# EAGLE board ProiectTSC_v6 (EAGLE 9.7.0)
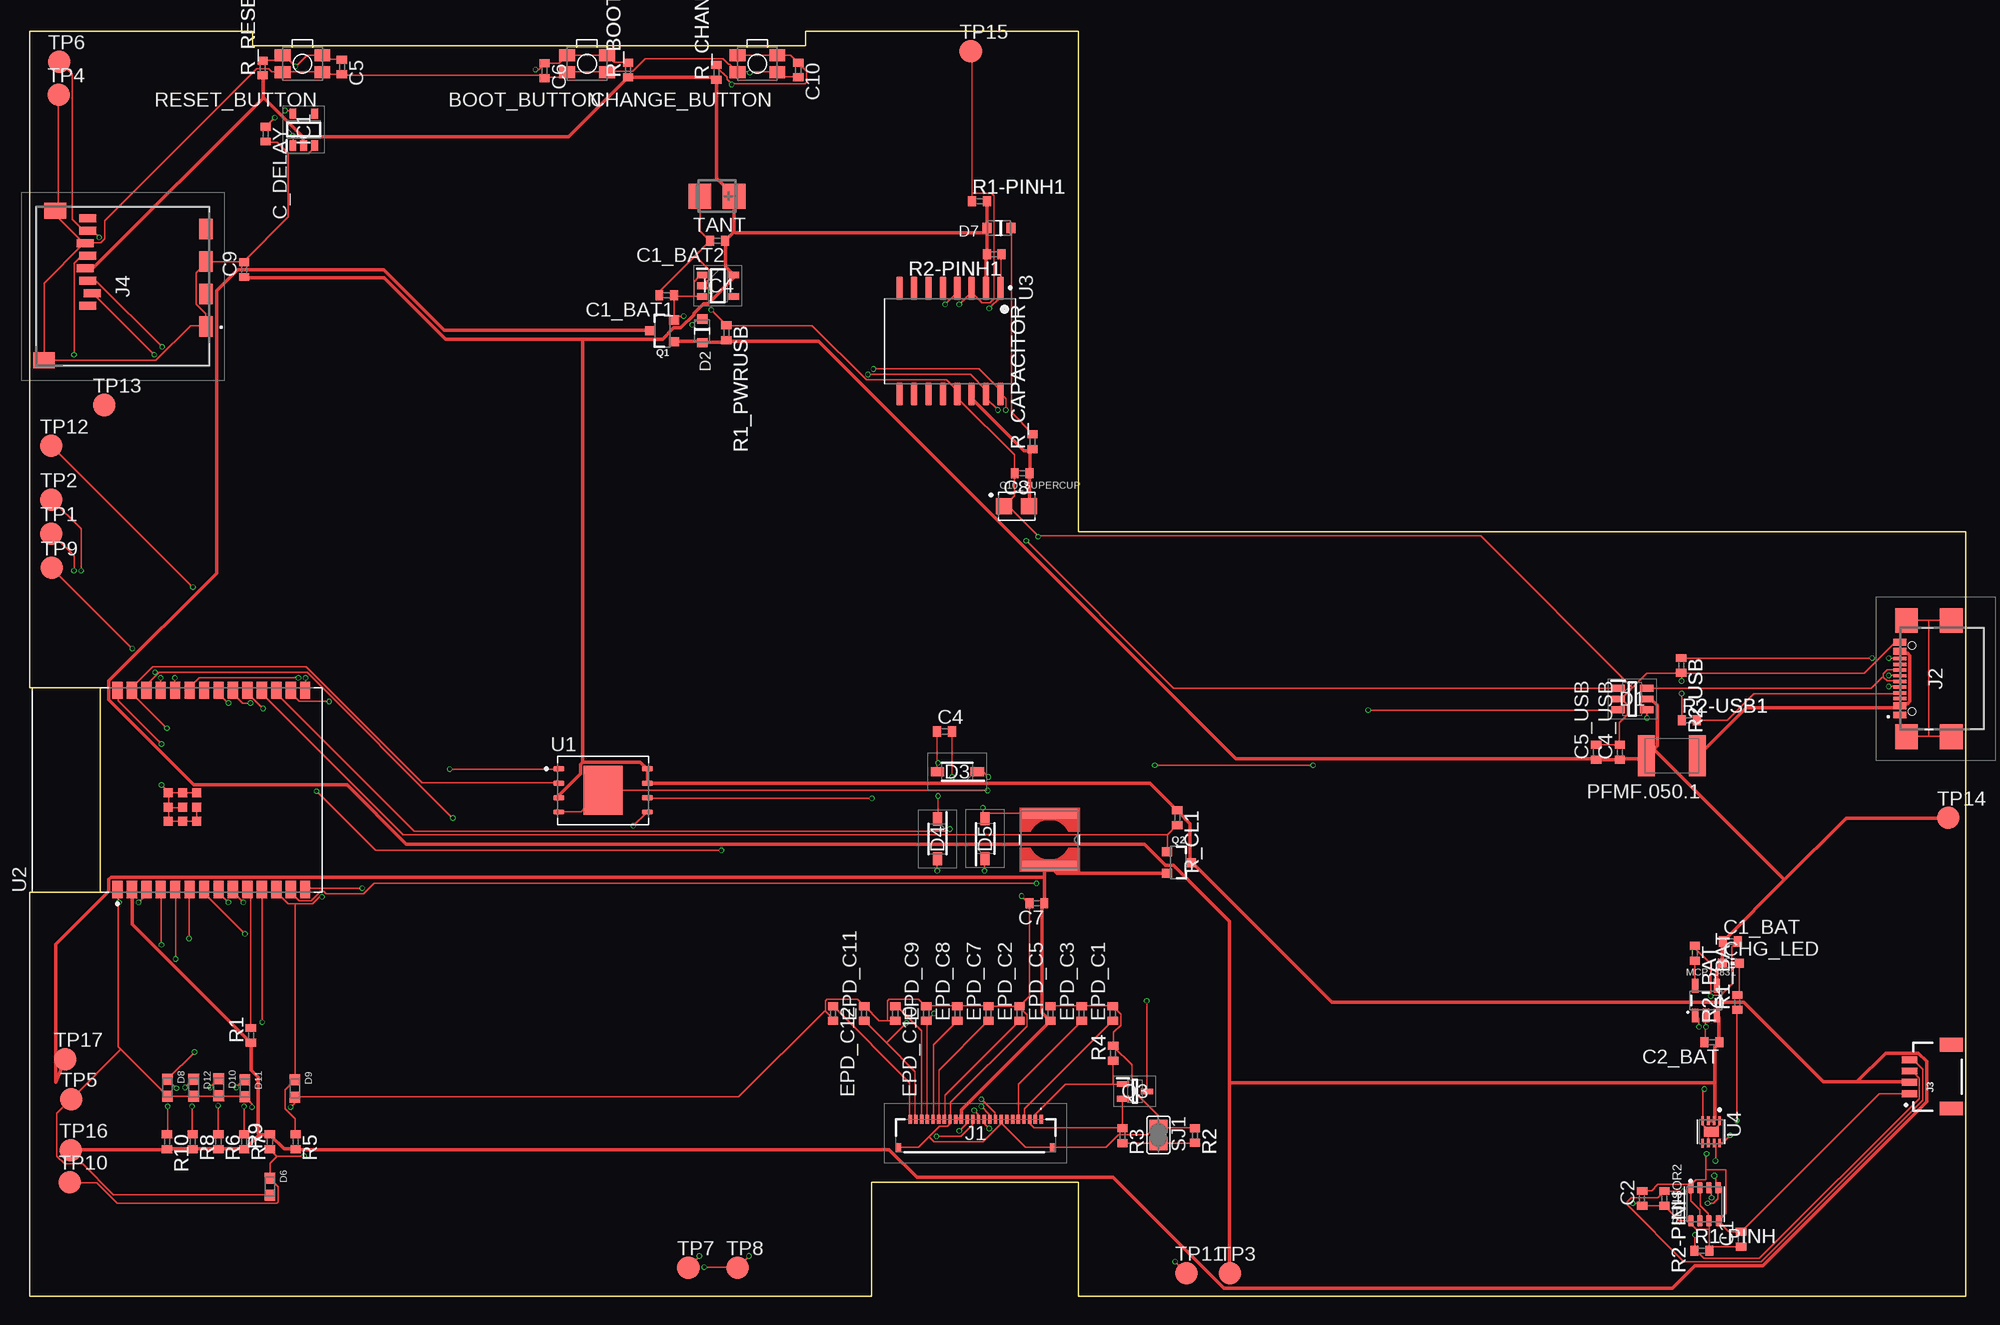
[diagram p0: board, top side]
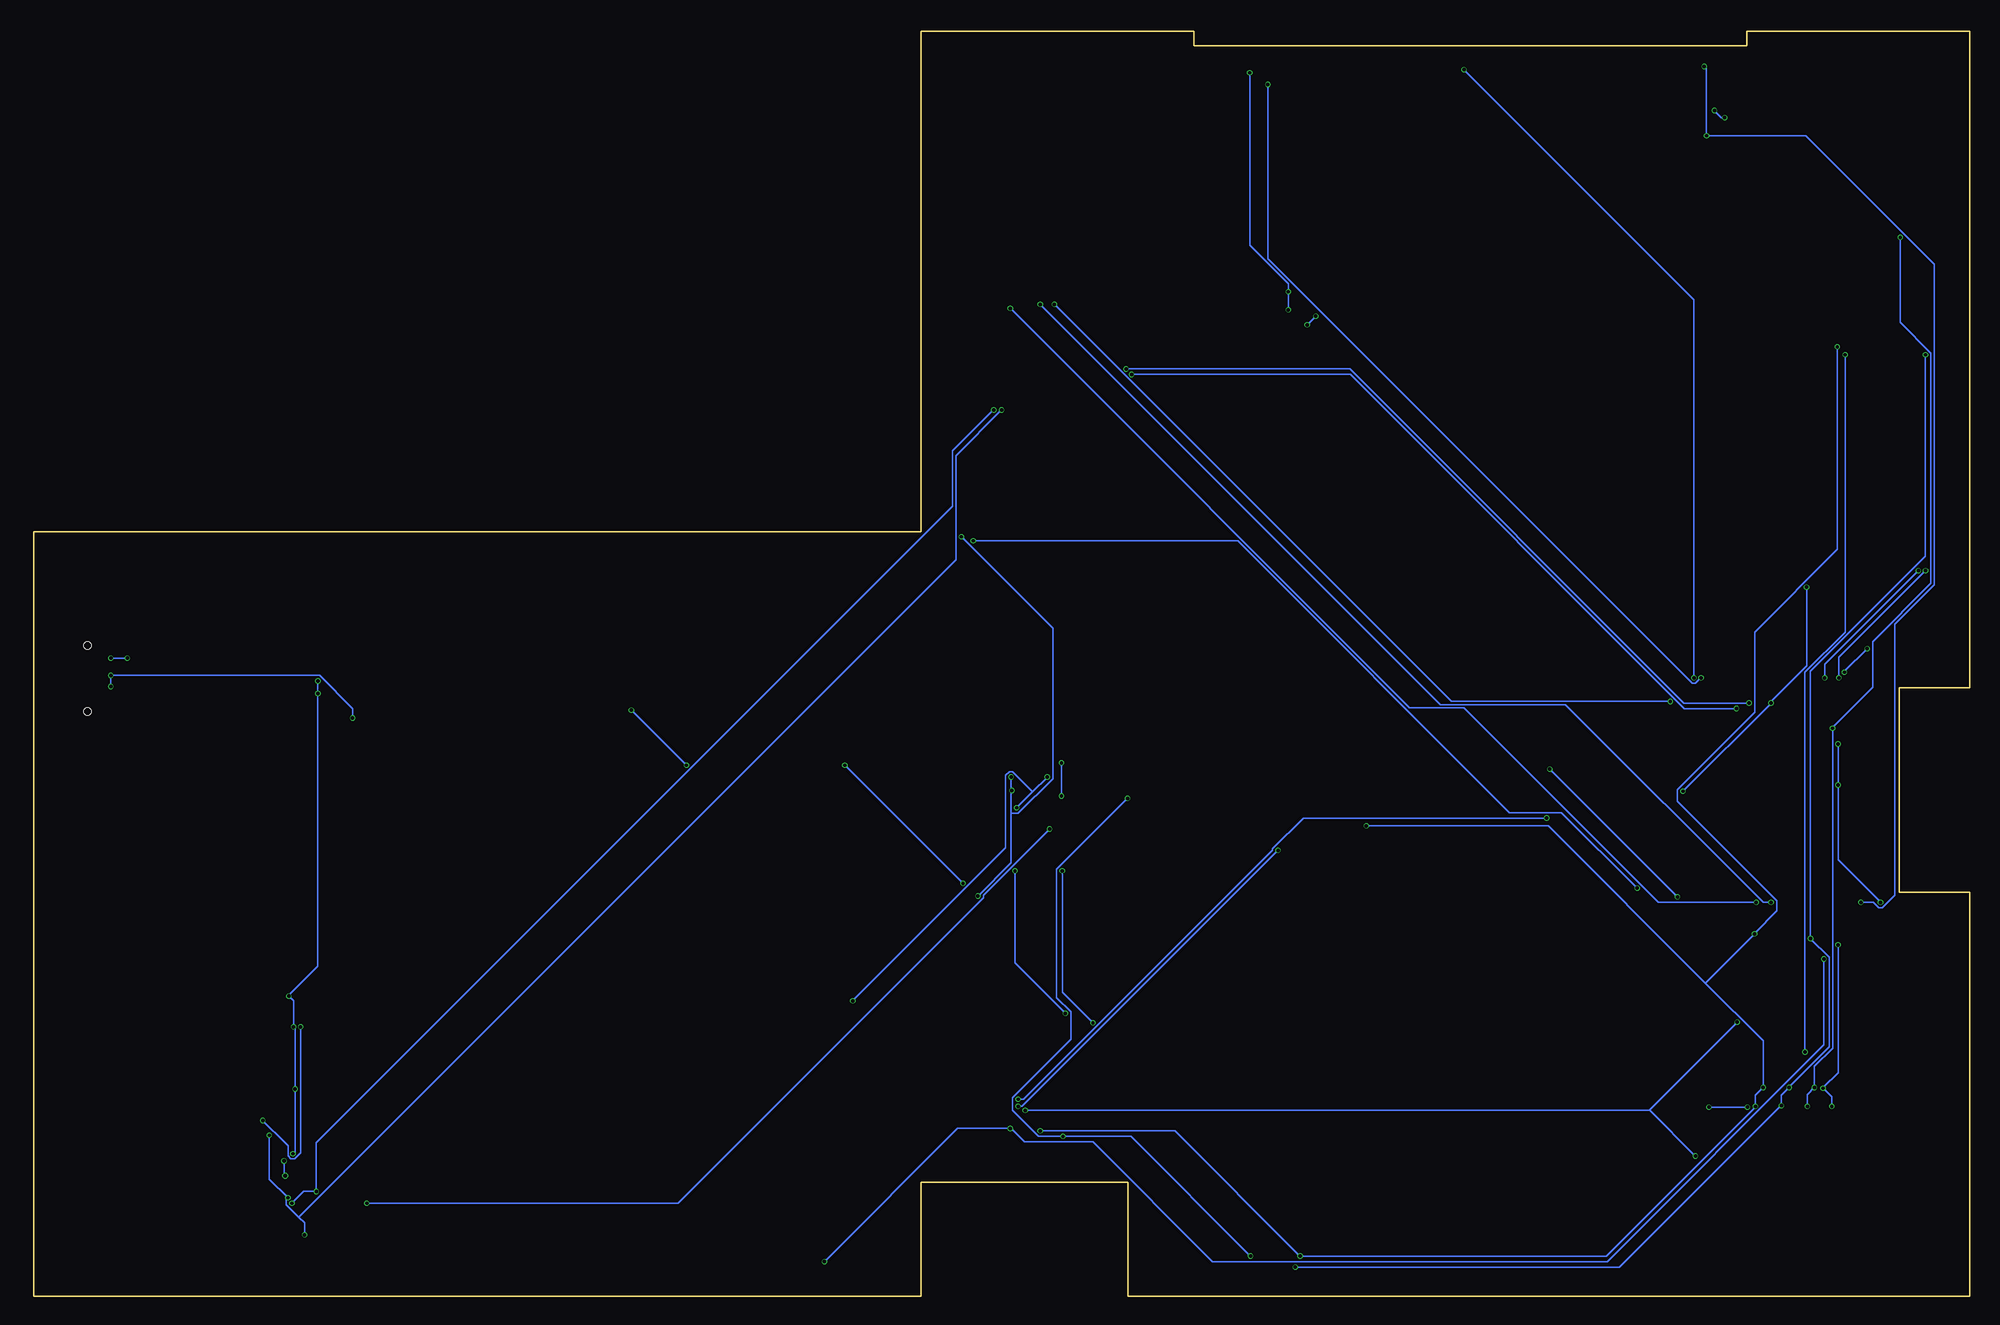
[diagram p1: board, bottom side, seen from below]

Size 170.2 x 111.2 mm. Coordinates in mm from the lower left corner, seen from the top.
Outline: 0,0 74,0 74,10 92.2,10 92.2,0 170.2,0 170.2,67.2 92.2,67.2 92.2,111.2 68.2,111.2 68.2,109.9 19.6,109.9 19.6,111.2 0,111.2 0,53.5 6.2,53.5 6.2,35.5 0,35.5 0,0
Copper layers (1*16): Top 0.035mm / dielectric 1.6mm / Bottom 0.035mm
Design rules "jlcpcb-2layers.dru": minimum track width 0.15mm, minimum drill 0.3mm, track to track 5mil, track to pad 5mil, pad to pad 5mil, via to via 5mil, smd to smd 5mil, copper to edge 0.2mm, drill to drill 6mil, minimum pad ring 10mil, minimum via ring 3mil, stop-mask expansion 4mil, vias tented up to drill 0mil, thermal gap 10mil
Net classes: 1 power: width 0.3 mm

## Footprints (pad centres in the part's own frame; a part is rotated, then mirrored left to right if it is on the bottom)
MYBUTTON = smd 1.4 x 1.05: 1 1.75,0.75; 2 -1.75,0.75; 3 -1.75,-0.75; 4 1.75,-0.75
EAGLE-LTSPICE_C0402 = smd 0.7 x 0.9: 1 -0.65,0; 2 0.65,0
CAPCP3225X100N = smd 1.4 x 1.4: 1 -1.1,0; 2 1.1,0
ADAFRUIT_CHIP-LED0603 = smd 0.8 x 0.8: A 0,-0.75; C 0,0.75
SOT95P280X145-6N = smd 1.2 x 0.6: 1 -1.25,0.95; 2 -1.25,0; 3 -1.25,-0.95; 4 1.25,-0.95; 5 1.25,0; 6 1.25,0.95
ESP32_WROVER_AVX---SD0805S020S1R0_AVX_SD0805S020S1R0_0 = smd 0.8 x 0.9: 1 -1.05,0; 2 1.05,0
SOD3716X135N = smd 1.15 x 0.8: 1 -1.75,0; 2 1.75,0
DIOC1608X36N = smd 0.97 x 0.94: 1 -0.75,0; 2 0.75,0
SOT95P280X125-5N = smd 0.9 x 0.6: 1 -1.4,0.95; 2 -1.4,0; 3 -1.4,-0.95; 4 1.4,-0.95; 5 1.4,0.95
SOT95P280X120-5N = smd 0.9 x 0.6: 1 -1.4,0.95; 2 -1.4,0; 3 -1.4,-0.95; 4 1.4,-0.95; 5 1.4,0.95
FH34SRJ24S05SH99 = smd 0.3 x 0.8: 1 5.75,1.45; 2 5.25,1.45; 3 4.75,1.45; 4 4.25,1.45; 5 3.75,1.45; 6 3.25,1.45; 7 2.75,1.45; 8 2.25,1.45; 9 1.75,1.45; 10 1.25,1.45; 11 0.75,1.45; 12 0.25,1.45; 13 -0.25,1.45; 14 -0.75,1.45; 15 -1.25,1.45; 16 -1.75,1.45; 17 -2.25,1.45; 18 -2.75,1.45; 19 -3.25,1.45; 20 -3.75,1.45; 21 -4.25,1.45; 22 -4.75,1.45; 23 -5.25,1.45; 24 -5.75,1.45 | smd 0.4 x 0.8: MP1 6.75,-1.05; MP2 -6.75,-1.05
SAMACSYS_PARTS_USB4110GFA = smd 0.3 x 1.15: A1 -3.35,3.678; A4 -2.55,3.678; A5 -1.25,3.678; A6 -0.25,3.678; A7 0.25,3.678; A8 1.25,3.678; A9 2.55,3.678; A12 3.35,3.678; B1 3.05,3.678; B4 2.25,3.678; B5 1.75,3.678; B6 0.75,3.678; B7 -0.75,3.678; B8 -1.75,3.678; B9 -2.25,3.678; B12 -3.05,3.678 | smd 2.18 x 2: MP1 -5.11,-0.827; MP2 5.11,-0.827; MP3 -5.11,3.103; MP4 5.11,3.103 | hole 0.65: -2.89,2.603; 2.89,2.603
JST04_1MM_RA = smd 0.6 x 1.35: 1 -1.5,0; 2 -0.5,0; 3 0.5,0; 4 1.5,0 | smd 1.2 x 2: NC1 2.8,-3.675; NC2 -2.8,-3.675
112ATAARR03ATTEND = smd 1.8 x 1.2: G1 10.6,10.4; G2 4.9,10.4; S1 7.75,10.4; S2 2.05,10.4 | smd 1.4 x 1.9: G3 13.6,-3.85; G4 0.45,-2.85 | smd 0.7 x 1.5: P1 8.8,0; P2 7.7,0.4; P3 6.6,0; P4 5.5,-0.2; P5 4.4,0; P6 3.3,-0.2; P7 2.2,0; P8 1.1,0
IND_4828-WE-TPC_WRE = smd 0.889 x 4.826: 1 -2.286,0; 2 2.286,0
ESP32_WROVER_SPARKFUN-IC-POWER_SOT23-5 = smd 0.55 x 1.2: 1 -0.95,-1.3; 2 0,-1.3; 3 0.95,-1.3; 4 0.95,1.3; 5 -0.95,1.3
ESP32C6_VARISTOR_CT/CN1812 = smd 1.5 x 3.6: 1 -2.25,0; 2 2.25,0
ESP32_WROVER_SPARKFUN-DISCRETESEMI_SOT23-3 = smd 0.8 x 0.9: 1 -0.95,-1; 2 0.95,-1; 3 0,1.1
SOT65P210X110-3N = smd 1.05 x 0.5: 1 -1.05,0.65; 2 -1.05,-0.65; 3 1.05,0
ESP32_WROVER_EAGLE-LTSPICE_R0402 = smd 0.7 x 0.9: 1 -0.65,0; 2 0.65,0
ESP32_WROVER_BME680_PSON80P300X300X100-8N = smd 1.016 x 0.5: 1 1.458,1.2; 2 1.458,0.4; 3 1.458,-0.4; 4 1.458,-1.2; 5 -1.458,-1.22; 6 -1.458,-0.4; 7 -1.458,0.4; 8 -1.458,1.2
SJ = smd 1.168 x 1.6: 1 -0.762,0; 2 0.762,0
RCL_CT3528 = smd 2 x 2.2: + -1.5,0; - 1.5,0
TP20R = smd 2 x 2: TP 0,0
SON127P600X800X80-9N = smd 0.94 x 0.44: 1 -3.895,1.905; 2 -3.895,0.635; 3 -3.895,-0.635; 4 -3.895,-1.905; 5 3.895,-1.905; 6 3.895,-0.635; 7 3.895,0.635; 8 3.895,1.905 | smd 3.4 x 4.3: 9 0,0
XCVR_ESP32-C6-WROOM-1-N8 = smd 1.5 x 0.9: 1 -8.75,5.26; 2 -8.75,3.99; 3 -8.75,2.72; 4 -8.75,1.45; 5 -8.75,0.18; 6 -8.75,-1.09; 7 -8.75,-2.36; 8 -8.75,-3.63; 9 -8.75,-4.9; 10 -8.75,-6.17; 11 -8.75,-7.44; 12 -8.75,-8.71; 13 -8.75,-9.98; 14 -8.75,-11.25; 15 8.75,-11.25; 16 8.75,-9.98; 17 8.75,-8.71; 18 8.75,-7.44; 19 8.75,-6.17; 20 8.75,-4.9; 21 8.75,-3.63; 22 8.75,-2.36; 23 8.75,-1.09; 24 8.75,0.18; 25 8.75,1.45; 26 8.75,2.72; 27 8.75,3.99; 28 8.75,5.26 | smd 0.8 x 0.8: 29_1 -2.755,0.79; 29_2 -1.505,0.79; 29_3 -0.255,0.79; 29_4 -2.755,-0.46; 29_5 -1.505,-0.46; 29_6 -0.255,-0.46; 29_7 -2.755,-1.71; 29_8 -1.505,-1.71; 29_9 -0.255,-1.71
SOIC127P1032X265-16N = smd 2.05 x 0.59: 1 -4.655,4.445; 2 -4.655,3.175; 3 -4.655,1.905; 4 -4.655,0.635; 5 -4.655,-0.635; 6 -4.655,-1.905; 7 -4.655,-3.175; 8 -4.655,-4.445; 9 4.655,-4.445; 10 4.655,-3.175; 11 4.655,-1.905; 12 4.655,-0.635; 13 4.655,0.635; 14 4.655,1.905; 15 4.655,3.175; 16 4.655,4.445
SON50P200X200X80-9N = smd 0.76 x 0.3: 1 -0.985,0.75; 2 -0.985,0.25; 3 -0.985,-0.25; 4 -0.985,-0.75; 6 0.985,-0.25; 7 0.985,0.25; 8 0.985,0.75 | smd 0.76 x 0.27: 5 0.985,-0.75 | smd 0.9 x 1.3: 9 0,0

## Placement (x,y rotation side)
BOOT_BUTTON  BUTTON_CUSYOMV1  [MYBUTTON]  48.98,108.34 180 top
C1  100nF  [EAGLE-LTSPICE_C0402]  150.44,5.02 90 top
C1_BAT  4.7uF  [EAGLE-LTSPICE_C0402]  149.51,31.18 0 top
C1_BAT1  4.7uF  [EAGLE-LTSPICE_C0402]  55.99,87.98 180 top
C1_BAT2  4.7uF  [EAGLE-LTSPICE_C0402]  60.45,92.78 180 top
C2  100nF  [EAGLE-LTSPICE_C0402]  141.74,8.6 90 top
C2_BAT  4.7uF  [EAGLE-LTSPICE_C0402]  147.88,22.32 180 top
C4  4.7uF/25V  [EAGLE-LTSPICE_C0402]  80.42,49.64 0 top
C4_USB  100nF  [EAGLE-LTSPICE_C0402]  139.8,47.81 90 top
C5  1uF  [EAGLE-LTSPICE_C0402]  27.44,108.05 270 top
C5_USB  4.7uF  [EAGLE-LTSPICE_C0402]  137.7,47.82 90 top
C6  100nF  [EAGLE-LTSPICE_C0402]  45.26,107.72 270 top
C7  10uF  [EAGLE-LTSPICE_C0402]  88.53,34.54 180 top
C8  100nF  [EAGLE-LTSPICE_C0402]  87.24,72.34 180 top
C9  100nF  [EAGLE-LTSPICE_C0402]  18.84,90.24 90 top
C10  100nF  [EAGLE-LTSPICE_C0402]  67.56,107.78 270 top
C10_SUPERCUP  CPH3225A  [CAPCP3225X100N]  86.75,69.44 0 top
C_DELAY  100nF  [EAGLE-LTSPICE_C0402]  20.72,102.15 270 top
CHANGE_BUTTON  BUTTON_CUSYOMV1  [MYBUTTON]  63.96,108.34 180 top
CHG_LED  [ADAFRUIT_CHIP-LED0603]  149.55,29.26 270 top
D1  USBLC6-2SC6Y  [SOT95P280X145-6N]  140.88,52.5 0 top
D2  SD0805S020S1R0  [ESP32_WROVER_AVX---SD0805S020S1R0_AVX_SD0805S020S1R0_0]  59.11,84.85 270 top
D3  MBR0530  [SOD3716X135N]  81.54,46.1 180 top
D4  MBR0530  [SOD3716X135N]  79.8,40.2 270 top
D5  MBR0530  [SOD3716X135N]  83.99,40.22 90 top
D6  PGB1010603MR  [DIOC1608X36N]  21.1,9.62 270 top
D7  SD0805S020S1R0  [ESP32_WROVER_AVX---SD0805S020S1R0_AVX_SD0805S020S1R0_0]  85.2,93.89 180 top
D8  PGB1010603MR  [DIOC1608X36N]  12.1,18.34 270 top
D9  PGB1010603MR  [DIOC1608X36N]  23.3,18.26 270 top
D10  PGB1010603MR  [DIOC1608X36N]  16.6,18.38 270 top
D11  PGB1010603MR  [DIOC1608X36N]  18.9,18.3 270 top
D12  PGB1010603MR  [DIOC1608X36N]  14.4,18.32 270 top
EPD_C1  1uF/50V  [EAGLE-LTSPICE_C0402]  95.2,24.86 90 top
EPD_C2  1uF/50V  [EAGLE-LTSPICE_C0402]  87.01,24.86 90 top
EPD_C3  1uF/50V  [EAGLE-LTSPICE_C0402]  92.47,24.86 90 top
EPD_C5  1uF/50V  [EAGLE-LTSPICE_C0402]  89.74,24.86 90 top
EPD_C7  1uF/50V  [EAGLE-LTSPICE_C0402]  84.28,24.86 90 top
EPD_C8  1uF/50V  [EAGLE-LTSPICE_C0402]  81.54,24.86 90 top
EPD_C9  1uF/50V  [EAGLE-LTSPICE_C0402]  78.81,24.86 90 top
EPD_C10  1uF/50V  [EAGLE-LTSPICE_C0402]  76.08,24.86 270 top
EPD_C11  1uF/50V  [EAGLE-LTSPICE_C0402]  73.35,24.86 90 top
EPD_C12  1uF/50V  [EAGLE-LTSPICE_C0402]  70.62,24.86 270 top
IC1  BD5229G-TR  [SOT95P280X125-5N]  24.08,102.55 90 top
IC4  XC6220A331MR-G  [SOT95P280X120-5N]  60.49,88.82 0 top
J1  FH34SRJ-24S-0.5SH_99_  [FH34SRJ24S05SH99]  83.15,14.12 0 top
J2  SAMACSYS_PARTS_USB4110-GF-A  [SAMACSYS_PARTS_USB4110GFA]  168.1,54.29 90 top
J3  QWIIC_RIGHT_ANGLE  [JST04_1MM_RA]  165.25,19.3 90 top
J4  112A-TAAR-R03_ATTEND  [112ATAARR03ATTEND]  5.08,95.86 270 top
L1  68uH  [IND_4828-WE-TPC_WRE]  89.65,40.13 270 top
MCP73831  ESP32_WROVER_SPARKFUN-IC-POWER_MCP73831  [ESP32_WROVER_SPARKFUN-IC-POWER_SOT23-5]  147.36,25.99 0 top
PFMF.050.1  ESP32C6_VARISTORCN1812  [ESP32C6_VARISTOR_CT/CN1812]  144.36,47.5 180 top
Q1  20V/4.2A/52mΩ/1.4W  [ESP32_WROVER_SPARKFUN-DISCRETESEMI_SOT23-3]  55.64,84.86 90 top
Q2  20V/4.2A/52mΩ/1.4W  [ESP32_WROVER_SPARKFUN-DISCRETESEMI_SOT23-3]  100.96,38.12 270 top
Q3  SI1308EDL-T1-GE3  [SOT65P210X110-3N]  97.15,18.01 0 top
R1  10K  [ESP32_WROVER_EAGLE-LTSPICE_R0402]  19.44,22.93 90 top
R1-PINH  10K  [ESP32_WROVER_EAGLE-LTSPICE_R0402]  146.99,4 0 top
R1-PINH1  10K  [ESP32_WROVER_EAGLE-LTSPICE_R0402]  83.5,96.24 0 top
R1_BAT  200  [ESP32_WROVER_EAGLE-LTSPICE_R0402]  150.12,25.83 90 top
R1_PWRUSB  100K  [ESP32_WROVER_EAGLE-LTSPICE_R0402]  61.24,84.69 270 top
R2  2.2  [ESP32_WROVER_EAGLE-LTSPICE_R0402]  102.44,14.13 270 top
R2-PINH  10K  [ESP32_WROVER_EAGLE-LTSPICE_R0402]  143.7,8.6 270 top
R2-PINH1  10K  [ESP32_WROVER_EAGLE-LTSPICE_R0402]  84.79,91.58 180 top
R2-USB  5k1  [ESP32_WROVER_EAGLE-LTSPICE_R0402]  145.18,55.45 270 top
R2-USB1  5k1  [ESP32_WROVER_EAGLE-LTSPICE_R0402]  145.89,50.62 0 top
R2_BAT  2K  [ESP32_WROVER_EAGLE-LTSPICE_R0402]  146.38,30.16 270 top
R3  0.47  [ESP32_WROVER_EAGLE-LTSPICE_R0402]  96.06,14.11 270 top
R4  10K  [ESP32_WROVER_EAGLE-LTSPICE_R0402]  95.24,21.35 90 top
R5  10K  [ESP32_WROVER_EAGLE-LTSPICE_R0402]  23.36,13.59 270 top
R6  10K  [ESP32_WROVER_EAGLE-LTSPICE_R0402]  16.58,13.59 270 top
R7  10K  [ESP32_WROVER_EAGLE-LTSPICE_R0402]  18.84,13.59 270 top
R8  10K  [ESP32_WROVER_EAGLE-LTSPICE_R0402]  14.32,13.59 270 top
R9  10K  [ESP32_WROVER_EAGLE-LTSPICE_R0402]  21.1,13.59 90 top
R10  10K  [ESP32_WROVER_EAGLE-LTSPICE_R0402]  12.06,13.59 270 top
R_BOOT  10K  [ESP32_WROVER_EAGLE-LTSPICE_R0402]  52.6,107.78 90 top
R_CAPACITOR  15  [ESP32_WROVER_EAGLE-LTSPICE_R0402]  88.16,75.11 90 top
R_CHANGE  10K  [ESP32_WROVER_EAGLE-LTSPICE_R0402]  60.36,107.58 90 top
R_CL1  10K  [ESP32_WROVER_EAGLE-LTSPICE_R0402]  100.88,42.07 270 top
R_RESET  10K  [ESP32_WROVER_EAGLE-LTSPICE_R0402]  20.46,107.96 90 top
RESET_BUTTON  BUTTON_CUSYOMV1  [MYBUTTON]  23.97,108.34 180 top
SENSOR2  BME688  [ESP32_WROVER_BME680_PSON80P300X300X100-8N]  147.22,8.08 90 top
SJ1  [SJ]  99.22,14.18 270 top
TANT  100uF  [RCL_CT3528]  60.41,96.7 180 top
TP1  TPTP20R  [TP20R]  1.89,67.04 0 top
TP2  TPTP20R  [TP20R]  1.89,70.02 0 top
TP3  TPTP20R  [TP20R]  105.51,2.02 0 top
TP4  TPTP20R  [TP20R]  2.53,105.62 0 top
TP5  TPTP20R  [TP20R]  3.65,17.32 0 top
TP6  TPTP20R  [TP20R]  2.57,108.52 0 top
TP7  TPTP20R  [TP20R]  57.89,2.52 0 top
TP8  TPTP20R  [TP20R]  62.21,2.52 0 top
TP9  TPTP20R  [TP20R]  1.93,64.02 0 top
TP10  TPTP20R  [TP20R]  3.52,10.04 0 top
TP11  TPTP20R  [TP20R]  101.67,2.04 0 top
TP12  TPTP20R  [TP20R]  1.87,74.74 0 top
TP13  TPTP20R  [TP20R]  6.52,78.34 0 top
TP14  TPTP20R  [TP20R]  168.67,42.04 0 top
TP15  TPTP20R  [TP20R]  82.72,109.44 0 top
TP16  TPTP20R  [TP20R]  3.57,12.84 0 top
TP17  TPTP20R  [TP20R]  3.12,20.84 0 top
U1  W25Q512JVEIQ  [SON127P600X800X80-9N]  50.39,44.46 0 top
U2  ESP32-C6-WROOM-1-N8  [XCVR_ESP32-C6-WROOM-1-N8]  12.96,44.5 90 top
U3  DS3231SN#  [SOIC127P1032X265-16N]  80.9,83.95 270 top
U4  MAX17048G+T10  [SON50P200X200X80-9N]  147.82,14.45 270 top

## Library data of the parts
BOOT_BUTTON CHANGE_BUTTON CHG_LED PFMF.050.1 RESET_BUTTON SJ1 TP1-TP17 = DeskAssistant v19 v1
C1 C1_BAT C1_BAT1 C1_BAT2 C2 C2_BAT C4 C4_USB C5 C5_USB C6-C10 C_DELAY EPD_C1-EPD_C3 EPD_C5 EPD_C7-EPD_C12 = DeskAssistant v19 v1; SPICEMODEL: NONE; SPICEPREFIX: C
C10_SUPERCUP = DeskAssistant v19 v1; AVAILABILITY: Not in stock; CHECK_PRICES: https://www.snapeda.com/parts/CPH3225A/Seiko+Instruments/view-part/?ref=eda; DESCRIPTION: 11 mF (EDLC) Supercapacitor 3.3 V 1210 (3225 Metric) - -; MF: Seiko Instruments; MP: CPH3225A; PACKAGE: 1210 Seiko; PRICE: None; PURCHASE-URL: https://www.snapeda.com/api/url_track_click_mouser/?unipart_id=562593&manufacturer=Seiko Instruments&part_name=CPH3225A&search_term=None; SNAPEDA_LINK: https://www.snapeda.com/parts/CPH3225A/Seiko+Instruments/view-part/?ref=snap
D1 = DeskAssistant v19 v1; AVAILABILITY: In Stock; CHECK_PRICES: https://www.snapeda.com/parts/USBLC6-2SC6Y/STMicroelectronics/view-part/?ref=eda; DESCRIPTION: 17V Clamp 5A (8/20µs) Ipp Tvs Diode Surface Mount SOT-23-6; MF: STMicroelectronics; MP: USBLC6-2SC6Y; PACKAGE: SOT-23-6 STMicroelectronics; PRICE: None; SNAPEDA_LINK: https://www.snapeda.com/parts/USBLC6-2SC6Y/STMicroelectronics/view-part/?ref=snap
D2 = DeskAssistant v19 v1; CENTROID_NOT_SPECIFIED: No; DATASHEET: http://datasheets.avx.com/schottky.pdf; DIGIKEY_DESCRIPTION: DIODE SCHOTTKY 20V 1A 0805; DIGIKEY_PART_NUMBER: 478-7800-1-ND; LEAD_FREE: yes; MF: AVX; MOUSER_PART_NUMBER: 581-SD0805S020S1R0; NUME: SD0805S020S1R0; PACKAGE: 0805 (2012 metric); PREFIX: D; ROHS: yes; TEMPERATURE_RANGE_HIGH: +125°C; TEMPERATURE_RANGE_LOW: -55°C
D3-D5 = DeskAssistant v19 v1; AVAILABILITY: In Stock; CHECK_PRICES: https://www.snapeda.com/parts/MBR0530/Onsemi/view-part/?ref=eda; DESCRIPTION: Diode Schottky 30 V 500mA Surface Mount SOD-123; MF: ON Semiconductor; MP: MBR0530; PACKAGE: SOD-123-2 ON Semiconductor; PRICE: None; PURCHASE-URL: https://www.snapeda.com/api/url_track_click_mouser/?unipart_id=179458&manufacturer=ON Semiconductor&part_name=MBR0530&search_term=None; SNAPEDA_LINK: https://www.snapeda.com/parts/MBR0530/Onsemi/view-part/?ref=snap
D6 D8-D12 = DeskAssistant v19 v1; AVAILABILITY: In Stock; CHECK_PRICES: https://www.snapeda.com/parts/PGB1010603MR/Littelfuse/view-part/?ref=eda; DESCRIPTION: 150V (Typ) Clamp - Ipp Tvs Diode Surface Mount 0603 (1608 Metric); MF: Littelfuse Inc.; MP: PGB1010603MR; PACKAGE: 0603 Littelfuse Inc.; PRICE: None; PURCHASE-URL: https://www.snapeda.com/api/url_track_click_mouser/?unipart_id=5659453&manufacturer=Littelfuse Inc.&part_name=PGB1010603MR&search_term=None; SNAPEDA_LINK: https://www.snapeda.com/parts/PGB1010603MR/Littelfuse/view-part/?ref=snap
D7 = DeskAssistant v19 v1; CENTROID_NOT_SPECIFIED: No; DATASHEET: http://datasheets.avx.com/schottky.pdf; DIGIKEY_DESCRIPTION: DIODE SCHOTTKY 20V 1A 0805; DIGIKEY_PART_NUMBER: 478-7800-1-ND; LEAD_FREE: yes; MF: AVX; MINE: SD0805S020S1R0; MOUSER_PART_NUMBER: 581-SD0805S020S1R0; PACKAGE: 0805 (2012 metric); PREFIX: D; ROHS: yes; TEMPERATURE_RANGE_HIGH: +125°C; TEMPERATURE_RANGE_LOW: -55°C
IC1 = DeskAssistant v19 v1; DESCRIPTION: Voltage Detector with Adjustable Delay Time: CMOS processes are utilized to develop high precision, low current consumption CMOS reset ICs that allow arbitrary setting of the delay time. The extensive lineup includes both Nch Open Drain and CMOS output types in a wide range of detection voltages (from 2.3V to 6.0V, in 0.1V steps), enabling selection of the ideal solution based on customer requirements. In addition, the entire series is of course both lead-free and RoHS-compliant.; HEIGHT: 1.25mm; MANUFACTURER_NAME: ROHM Semiconductor; MANUFACTURER_PART_NUMBER: BD5229G-TR; MOUSER_PART_NUMBER: 755-BD5229G-TR; MOUSER_PRICE-STOCK: https://www.mouser.co.uk/ProductDetail/ROHM-Semiconductor/BD5229G-TR?qs=4kLU8WoGk0vvnhrrYwdszw%3D%3D
IC4 = DeskAssistant v19 v1; DESCRIPTION: LDO Voltage Regulators; HEIGHT: 1.2mm; MANUFACTURER_NAME: Torex; MANUFACTURER_PART_NUMBER: XC6220A331MR-G; MOUSER_PART_NUMBER: 865-XC6220A331MR-G; MOUSER_PRICE-STOCK: https://www.mouser.co.uk/ProductDetail/Torex-Semiconductor/XC6220A331MR-G?qs=AsjdqWjXhJ8ZSWznL1J0gg%3D%3D
J1 = DeskAssistant v19 v1; DESCRIPTION: 24 Position FFC, FPC Connector Contacts, Top and Bottom 0.020" (0.50mm) Surface Mount, Right Angle; HEIGHT: 1.1mm; MANUFACTURER_NAME: Hirose; MANUFACTURER_PART_NUMBER: FH34SRJ-24S-0.5SH(99); MOUSER_PART_NUMBER: 798-FH34SRJ24S05SH99; MOUSER_PRICE-STOCK: https://www.mouser.co.uk/ProductDetail/Hirose-Connector/FH34SRJ-24S-0.5SH99?qs=vcbW%252B4%252BSTIpKBl5ap9J8Fw%3D%3D
J2 = DeskAssistant v19 v1; DESCRIPTION: CONN USB 2.0 TYPE-C R/A SMT; HEIGHT: 3.26mm; MANUFACTURER_NAME: GCT (GLOBAL CONNECTOR TECHNOLOGY); MANUFACTURER_PART_NUMBER: USB4110-GF-A; MOUSER_PART_NUMBER: 640-USB4110-GF-A; MOUSER_PRICE-STOCK: https://www.mouser.co.uk/ProductDetail/GCT/USB4110-GF-A?qs=KUoIvG%2F9IlYiZvIXQjyJeA%3D%3D
J3 = DeskAssistant v19 v1; PROD_ID: CONN-13694
J4 = DeskAssistant v19 v1; DESCRIPTION: Micro SD Card Socket, Push-Push Type, Top Mount, SMT, H=1.83mm, 10u; HEIGHT: 1.9mm; MANUFACTURER_NAME: ATTEND; MANUFACTURER_PART_NUMBER: 112A-TAAR-R03 ATTEND
L1 = DeskAssistant v19 v1; COPYRIGHT: Copyright (C) 2024 Ultra Librarian. All rights reserved.; MANUFACTURER_PART_NUMBER: 744043680; MFR_NAME: Wurth Electronics; NUME: 68uH
MCP73831 = DeskAssistant v19 v1; PROD_ID: IC-09995
Q1 = DeskAssistant v19 v1; NUME: DMG2305UX-7; PROD_ID: TRAN-14388
Q2 = DeskAssistant v19 v1; MINE: DMG2305UX-7; PROD_ID: TRAN-14388
Q3 = DeskAssistant v19 v1; AVAILABILITY: In Stock; CHECK_PRICES: https://www.snapeda.com/parts/SI1308EDL-T1-GE3/Vishay+Siliconix/view-part/?ref=eda; DESCRIPTION: Si1308EDL-T1-GE3 N-channel MOSFET Transistor, 1.5 A, 30 V, 3-Pin SC-70 | Siliconix / Vishay SI1308EDL-T1-GE3; MF: Vishay Siliconix; MP: SI1308EDL-T1-GE3; PACKAGE: SOT-323 Vishay Semiconductor; PRICE: None; PURCHASE-URL: https://www.snapeda.com/api/url_track_click_mouser/?unipart_id=274603&manufacturer=Vishay Siliconix&part_name=SI1308EDL-T1-GE3&search_term=None; SNAPEDA_LINK: https://www.snapeda.com/parts/SI1308EDL-T1-GE3/Vishay+Siliconix/view-part/?ref=snap
R1 R1-PINH R1-PINH1 R1_BAT R1_PWRUSB R2 R2-PINH R2-PINH1 R2-USB R2-USB1 R2_BAT R3-R10 R_BOOT R_CAPACITOR R_CHANGE R_CL1 R_RESET = DeskAssistant v19 v1; SPICEMODEL: NONE; SPICEPREFIX: R
SENSOR2 = DeskAssistant v19 v1; AVAILABILITY: Unavailable; DESCRIPTION: Integrated Environmental Unit; MF: Bosch Sensortec; MP: BME680; PACKAGE: LGA-8 Bosch Tools; PRICE: None
TANT = DeskAssistant v19 v1; SPICEPREFIX: C
U1 = DeskAssistant v19 v1; AVAILABILITY: In Stock; CHECK_PRICES: https://www.snapeda.com/parts/W25Q512JVEIQ/Winbond+Electronics/view-part/?ref=eda; DESCRIPTION: FLASH - NOR Memory IC 512Mb (64M x 8) SPI - Quad I/O 133 MHz 8-WSON (8x6); MF: Winbond Electronics; MP: W25Q512JVEIQ; PACKAGE: Package; PRICE: None; SNAPEDA_LINK: https://www.snapeda.com/parts/W25Q512JVEIQ/Winbond+Electronics/view-part/?ref=snap
U2 = DeskAssistant v19 v1; AVAILABILITY: In Stock; CHECK_PRICES: https://www.snapeda.com/parts/ESP32-C6-WROOM-1-N8/Espressif+Systems/view-part/?ref=eda; DESCRIPTION: Multiprotocol Modules ESP32-C6 module, Wi-Fi 6 in 2.4 GHz band, Bluetooth 5, Zigbee 3.0 and Thread. ESP34-WROOM Compatible - ENGINEERING SAMPLE; MF: Espressif Systems; MP: ESP32-C6-WROOM-1-N8; PACKAGE: None; PRICE: None; SNAPEDA_LINK: https://www.snapeda.com/parts/ESP32-C6-WROOM-1-N8/Espressif+Systems/view-part/?ref=snap
U3 = DeskAssistant v19 v1; AVAILABILITY: In Stock; CHECK_PRICES: https://www.snapeda.com/parts/DS3231SN%23/Analog+Devices/view-part/?ref=eda; DESCRIPTION: Extremely Accurate I²C-Integrated RTC/TCXO/Crystal; MF: Analog Devices; MP: DS3231SN#; PACKAGE: SOIC-16 Maxim; PRICE: None; PURCHASE-URL: https://www.snapeda.com/api/url_track_click_mouser/?unipart_id=99048&manufacturer=Analog Devices&part_name=DS3231SN#&search_term=None; SNAPEDA_LINK: https://www.snapeda.com/parts/DS3231SN%23/Analog+Devices/view-part/?ref=snap
U4 = DeskAssistant v19 v1; AVAILABILITY: In Stock; CHECK_PRICES: https://www.snapeda.com/parts/MAX17048G+T10/Analog+Devices/view-part/?ref=eda; DESCRIPTION: 3µA 1-Cell/2-Cell Fuel Gauge with ModelGauge; MF: Analog Devices; MP: MAX17048G+T10; PACKAGE: TDFN-8 Maxim; PRICE: None; PURCHASE-URL: https://www.snapeda.com/api/url_track_click_mouser/?unipart_id=329239&manufacturer=Analog Devices&part_name=MAX17048G+T10&search_term=None; SNAPEDA_LINK: https://www.snapeda.com/parts/MAX17048G+T10/Analog+Devices/view-part/?ref=snap

## Nets
3V3 [power]: C1_BAT2.1 C9.1 D7.2 IC1.2 IC4.5 J3.2 J4.P4 Q2.3 R1-PINH1.2 R1.1 R2-PINH1.2 R5.2 R6.2 R7.2 R8.2 R9.2 R10.2 R_BOOT.1 R_CHANGE.1 R_CL1.1 R_RESET.1 TANT.+ TP16.TP U1.3 U1.7 U1.8 U2.2 U3.2
32KHZ: R2-PINH1.1 U2.9 U3.1
DN: D1.4 J2.A7 J2.B7
DP: D1.6 J2.A6 J2.B6
EDP_3V3_C [power]: TP13.TP
EPD_3V3 [power]: C7.1 EPD_C5.1 J1.15 J1.16 L1.2 Q2.2 TP17.TP
EPD_3V3_C: Q2.1 R_CL1.2 U2.18
EPD_BUSY: J1.9 TP9.TP U2.26
EPD_CS: D6.1 J1.12 R9.1 TP10.TP U2.11
EPD_DC: J1.11 TP11.TP U2.5
EPD_RST: J1.10 TP12.TP U2.21
FLASH_CS: D9.1 R5.1 U1.1 U2.12
GDR: J1.2 Q3.1 R4.1
GND: BOOT_BUTTON.1 BOOT_BUTTON.2 C1.2 C1_BAT1.2 C1_BAT2.2 C1_BAT.2 C2.2 C2_BAT.2 C4_USB.2 C5.2 C5_USB.2 C6.2 C7.2 C8.2 C9.2 C10.2 C10_SUPERCUP.1 C_DELAY.2 CHANGE_BUTTON.1 CHANGE_BUTTON.2 D1.2 D3.1 D6.2 D8.2 D9.2 D10.2 D11.2 D12.2 EPD_C1.2 EPD_C2.2 EPD_C3.2 EPD_C5.2 EPD_C7.2 EPD_C8.2 EPD_C9.2 EPD_C10.2 EPD_C11.2 EPD_C12.2 IC1.3 IC4.2 J1.8 J1.17 J1.MP1 J1.MP2 J2.A1 J2.A12 J2.B1 J2.B12 J2.MP1 J2.MP2 J2.MP3 J2.MP4 J3.1 J4.G1 J4.G2 J4.G3 J4.G4 J4.P6 MCP73831.2 R1_PWRUSB.1 R2-USB1.1 R2-USB.2 R2.1 R2_BAT.1 R4.2 RESET_BUTTON.1 RESET_BUTTON.2 SENSOR2.1 SENSOR2.5 SENSOR2.7 SJ1.1 TANT.- TP4.TP TP5.TP U1.4 U1.9 U2.1 U2.28 U2.29_1 U2.29_2 U2.29_3 U2.29_4 U2.29_5 U2.29_6 U2.29_7 U2.29_8 U2.29_9 U3.13 U4.1 U4.4 U4.6 U4.9
GPIO8: R1.2 U2.10
I2C_PW: C1.1 C2.1 R1-PINH.2 R2-PINH.2 SENSOR2.2 SENSOR2.6 SENSOR2.8 U2.17
INT_RTC: R1-PINH1.1 TP15.TP U2.8 U3.3
IO/BOOT: BOOT_BUTTON.3 BOOT_BUTTON.4 C6.1 R_BOOT.2 U2.15
IO/CHANGE: C10.1 CHANGE_BUTTON.3 CHANGE_BUTTON.4 R_CHANGE.2 U2.23
MISO: D12.1 J4.P7 R8.1 TP6.TP U1.2 U2.27
MOSI: D11.1 J1.14 J4.P3 R7.1 TP7.TP U1.5 U2.7
N$1: MCP73831.5 R2_BAT.2
N$2: J2.A5 R2-USB1.2
N$3: MCP73831.1 R1_BAT.1
N$4: C4.1 D3.2 D4.1
N$5: C1_BAT1.1 D2.1 IC4.1 IC4.3 Q1.2
N$6: CHG_LED.C R1_BAT.2
N$7: EPD_C12.1 J1.24
N$8: J2.B5 R2-USB.1
N$10: EPD_C10.1 J1.22
N$12: C_DELAY.1 IC1.5
N$13: D7.1 R_CAPACITOR.2
N$15: EPD_C8.1 J1.20
N$17: EPD_C7.1 J1.19
N$19: EPD_C2.1 J1.18
N$23: EPD_C1.1 J1.4
N$24: EPD_C3.1 J1.5
PREVGH: D5.1 EPD_C9.1 J1.21
PREVGL: D4.2 EPD_C11.1 J1.23
RESE: J1.3 Q3.2 R3.1
RESE': R2.2 R3.2 SJ1.2
RESET: C5.1 IC1.1 R_RESET.2 RESET_BUTTON.3 RESET_BUTTON.4 U2.3
RTC_RST: U2.16 U3.4
RX: TP2.TP U2.24
SCK: D10.1 J1.13 J4.P5 R6.1 TP8.TP U1.6 U2.6
SCL: J3.4 R2-PINH.1 SENSOR2.4 U2.20 U3.16 U4.7
SDA: J3.3 R1-PINH.1 SENSOR2.3 U2.19 U3.15 U4.8
SRC: C4.2 D5.2 L1.1 Q3.3
SS_SD: D8.1 J4.P2 R10.1 U2.4
TX: TP1.TP U2.25
USB_D+: D1.1 U2.14
USB_D-: D1.3 U2.13
VBAT [power]: C2_BAT.1 MCP73831.3 Q1.3 TP3.TP U4.2 U4.3
VBUS [power]: C1_BAT.1 C4_USB.1 C5_USB.1 CHG_LED.A D1.5 D2.2 MCP73831.4 PFMF.050.1.2 Q1.1 R1_PWRUSB.2 TP14.TP
VRTC [power]: C8.1 C10_SUPERCUP.2 R_CAPACITOR.1 U3.14
VUSB [power]: J2.A4 J2.A9 J2.B4 J2.B9 PFMF.050.1.1

## Tracks (layer width: path | path; a pad name or v marks a point on that pad's centre or on a via)
3V3
  Top 0.3: 24.03,101.87 24.03,101.17 IC1.2 | 20.53,105.36 20.5,105.4 20.5,107.27 R_RESET.1 | 20.53,105.36 24.03,101.87 | 20.53,105.36 5.54,90.37 4.92,90.37 J4.P4 | 48.61,46.95 48.41,46.74 48.41,45.91 46.54,44.04 46.54,43.84 U1.3 | 48.61,46.95 53.67,46.95 54.22,46.4 U1.8 54.29,46.26 54.29,45.15 U1.7 54.43,45.08 98.47,45.08 100.76,42.8 R_CL1.1 100.9,42.66 102,41.55 102,38.16 Q2.3 102.21,38.09 114.47,25.83 150.69,25.83 157.68,18.84 160.62,18.84 | D7.2 84.14,93.83 84.14,91.62 R2-PINH1.2 84.07,91.48 84.07,88.64 U3.2 | R1-PINH1.2 84.14,96.19 84.14,94.04 D7.2 | 48.61,84.14 55.61,84.14 56.58,85.11 57.2,85.11 58.38,86.28 58.38,86.42 59.21,87.25 59.62,87.25 61.84,89.47 61.84,89.75 IC4.5 61.77,89.89 61.15,90.51 61.15,92.73 C1_BAT2.1 61.22,92.86 61.91,93.56 | 48.61,84.14 36.56,84.14 31.16,89.54 18.91,89.54 C9.1 | 61.91,93.56 61.91,96.67 TANT.+ 61.84,96.81 60.39,98.27 60.39,106.78 R_CHANGE.1 60.32,106.99 60.18,107.13 52.63,107.13 R_BOOT.1 52.49,107.06 47.37,101.94 24.17,101.94 24.03,101.87 | D7.2 84,93.49 62.05,93.49 61.91,93.56 | 48.61,84.14 48.61,46.95 | 20.15,14.2 21.05,14.2 R9.2 21.19,14.13 22.37,12.95 23.34,12.95 R5.2 23.48,12.88 75.55,12.88 77.97,10.46 95.22,10.46 104.98,0.69 144.39,0.69 146.4,2.69 152.36,2.69 166.76,17.1 166.76,20.66 166.04,21.38 165.12,21.38 163.16,21.38 160.62,18.84 | 20.15,14.2 18.97,13.02 R7.2 16.69,12.95 R6.2 16.55,12.95 14.47,12.95 R8.2 14.27,12.95 12.12,12.95 R10.2 11.98,12.88 3.6,12.88 TP16.TP | 20.15,14.2 20.08,14.34 20.08,19.25 19.46,19.88 19.46,22.23 R1.1 19.32,22.37 9,32.69 9,35.73 U2.2 | 160.62,18.84 165.23,18.84 J3.2
32KHZ  (via drill 0.3)
  Top 0.15: R2-PINH1.1 85.39,91.55 85.39,88.64 U3.1 85.32,88.57 85.32,87.81 v84.35,86.84 | v18.77,34.62 17.87,35.52 17.87,35.73 U2.9
  Bottom 0.15: v18.77,34.62 27.35,34.62 44.46,51.73 49.24,51.73 v84.35,86.84
DN  (via drill 0.3)
  Top 0.15: v163.43,53.6 164.4,53.6 J2.B7 | v163.43,54.57 164.4,54.57 J2.A7 | v142.17,50.83 142.17,51.52 D1.4
  Bottom 0.15: v163.43,53.6 v163.43,54.57 145.08,54.57 142.17,51.66 v142.17,50.83
DP
  Top 0.15: 162.94,54.43 163.29,54.08 164.4,54.08 J2.A6 | 162.94,54.43 162.94,54.71 163.29,55.05 164.4,55.05 J2.B6 | D1.6 142.17,53.46 161.91,53.46 162.88,54.43 162.94,54.43
EPD_3V3
  Top 0.3: J1.16 81.44,15.58 81.85,15.58 J1.15 81.92,15.72 81.92,16.41 89.61,24.1 EPD_C5.1 89.68,24.24 88.99,24.93 88.99,34.28 89.12,34.42 C7.1 89.19,34.56 89.19,36.84 | 89.19,36.84 89.19,37.4 89.61,37.81 L1.2 89.75,37.74 90.3,37.19 99.93,37.19 Q2.2 | 89.19,36.84 7.13,36.84 6.92,36.63 6.92,35.59 2.29,30.95 2.29,18.83 TP17.TP
EPD_3V3_C
  Top 0.15: 100,40.58 100,39.13 Q2.1 | 100,40.58 100.83,41.41 R_CL1.2 | 100,40.58 32.83,40.58 20.43,52.98 20.43,53.18 U2.18
EPD_BUSY  (via drill 0.3)
  Top 0.15: v83.65,17.31 84.83,16.14 84.83,15.58 J1.9 | v37.19,42.03 24.38,54.85 11.36,54.85 11.18,54.67 | 11.18,54.67 10.25,53.74 U2.26 | v9,56.92 1.94,63.99 TP9.TP | 11.18,54.67 v11.01,54.85
  Bottom 0.15: v83.65,17.31 83.17,17.31 61.29,39.2 61.29,39.33 58.59,42.03 v37.19,42.03 | v9,56.92 11.01,54.91 v11.01,54.85
EPD_CS  (via drill 0.3)
  Top 0.15: v83.03,16.34 83.38,16 83.38,15.58 J1.12 | 21.68,12.33 v24.1,12.33 | 21.68,12.33 21.12,12.88 R9.1 | 21.68,12.33 21.68,12.26 21.12,11.7 21.12,10.39 D6.1 21.12,10.32 21.81,9.63 21.81,8.31 21.68,8.17 7.69,8.17 5.89,9.97 3.53,9.97 TP10.TP | v20.43,24.1 20.43,35.73 U2.11
  Bottom 0.15: 28.12,16.34 v83.03,16.34 | v24.1,12.33 28.12,16.34 | v20.43,24.1 28.12,16.41 28.12,16.34
EPD_DC  (via drill 0.3)
  Top 0.15: v84.35,14.75 83.93,15.17 83.93,15.51 J1.11 | v100.69,3.05 101.66,2.08 TP11.TP | v12.81,29.64 12.81,35.73 U2.5
  Bottom 0.15: v100.69,3.05 88.99,14.75 v84.35,14.75 84.28,14.75 83.1,13.57 77.08,13.57 66.55,3.05 31.86,3.05 12.81,22.09 v12.81,29.64
EPD_RST  (via drill 0.3)
  Top 0.15: v83.65,16.69 84.35,16 84.35,15.58 J1.10 | v60.8,39.2 30.4,39.2 v25.21,44.39 | v17.45,52.15 16.62,52.98 16.62,53.18 U2.21 | v14.34,62.33 1.94,74.72 TP12.TP
  Bottom 0.15: v83.65,16.69 83.31,16.69 v60.8,39.2 | v25.21,44.39 v17.45,52.15 17.45,52.28 14.34,55.4 v14.34,62.33
FLASH_CS  (via drill 0.3)
  Top 0.15: R5.1 23.34,14.27 23.34,15.58 22.44,16.48 22.44,18.14 23.27,18.97 D9.1 23.34,19.04 23.34,34.49 | v36.91,46.33 46.47,46.33 U1.1 | v25.69,35.11 25.48,35.11 24.86,34.49 23.34,34.49 | 23.34,34.49 22.71,34.49 21.68,35.52 21.68,35.73 U2.12
  Bottom 0.15: v25.69,35.11 v36.91,46.33
GDR
  Top 0.15: 95.22,18.63 96.05,18.63 Q3.1 | 95.22,18.63 91.06,18.63 88.43,16 88.43,15.58 J1.2 | 95.22,18.63 95.22,20.64 R4.1
GND  (via drill 0.3)
  Top 0.15: D6.2 21.05,8.93 7.34,8.93 4.64,11.63 3.05,11.63 2.35,12.33 2.35,16.07 3.6,17.31 TP5.TP 3.67,17.38 8,21.71 | U2.29_8 14.68,42.94 14.68,41.76 U2.29_7 14.61,41.76 13.43,41.76 U2.29_4 13.37,41.76 12.26,41.76 U2.29_1 12.19,41.76 12.19,42.94 U2.29_2 | U2.29_5 13.37,42.94 12.26,42.94 U2.29_2 | U2.29_3 12.19,44.25 13.37,44.25 U2.29_6 13.43,44.25 14.61,44.25 U2.29_9 | v11.56,48.54 7.76,52.35 7.76,53.18 U2.28 | v11.56,44.94 12.19,44.32 U2.29_3 | U2.29_2 12.19,43.07 12.19,44.18 U2.29_3 | v22.92,16.62 23.27,16.97 23.27,17.45 D9.2 23.34,17.52 62.33,17.52 69.87,25.07 69.94,25.07 | v19.53,16.62 19.53,16.9 18.91,17.52 D11.2 18.84,17.59 16.62,17.59 D10.2 16.55,17.59 14.4,17.59 D12.2 14.34,17.59 12.12,17.59 D8.2 12.05,17.66 8,21.71 | 7.76,34.62 7.76,21.95 8,21.71 | 7.76,34.62 7.76,35.73 U2.1 | v7.83,34.62 7.76,34.62 | 79.05,14.02 79.98,14.96 80.68,14.96 80.88,15.17 80.88,15.51 J1.17 80.95,15.58 80.95,17.04 87.67,23.75 87.67,24.72 86.98,25.41 EPD_C2.2 | 79.05,14.02 78.11,13.09 76.45,13.09 J1.MP2 | 85.45,15.17 85.45,15.51 J1.8 | 85.45,15.17 87.53,13.09 89.89,13.09 J1.MP1 89.96,13.09 94.6,13.09 95.7,14.2 98.27,14.2 99.1,15.03 SJ1.1 | 79.05,14.02 79.5,13.57 83.79,13.57 85.39,15.17 85.45,15.17 | R2.1 102.42,14.82 99.31,14.82 99.23,14.89 SJ1.1 | EPD_C5.2 89.75,25.55 92.45,25.55 EPD_C3.2 92.52,25.55 95.15,25.55 EPD_C1.2 95.22,25.48 95.91,24.79 95.91,23.82 95.29,23.2 95.29,22.02 R4.2 95.29,21.95 96.88,20.36 96.88,18.21 99.17,15.93 99.17,14.96 SJ1.1 | U1.4 46.54,42.59 48.48,42.59 50.34,44.46 U1.9 50.41,44.46 v84.21,44.46 | 69.94,25.07 70.57,24.45 70.57,24.24 EPD_C12.2
  Top 0.15: 69.94,25.07 69.94,25.97 70.08,26.11 72.78,26.11 73.34,25.55 EPD_C11.2 73.41,25.48 74.65,24.24 75.41,24.24 | 75.41,24.24 76.04,24.24 EPD_C10.2 | EPD_C2.2 86.98,25.48 84.35,25.48 EPD_C7.2 84.21,25.55 81.58,25.55 EPD_C8.2 81.51,25.55 78.88,25.55 EPD_C9.2 78.74,25.48 78.11,26.11 75.55,26.11 75.41,25.97 75.41,24.24 | EPD_C2.2 87.05,25.55 87.88,26.38 87.88,34.49 C7.2 87.81,34.56 v87.19,35.18 | v84.28,45.64 83.86,46.05 83.31,46.05 D3.1 | C5_USB.2 137.74,48.48 139.75,48.48 C4_USB.2 139.75,48.54 139.75,50.41 140.44,51.11 140.44,52.01 139.95,52.49 D1.2 139.68,52.56 139.95,52.56 140.89,53.5 | 140.89,53.5 142.17,54.78 145.15,54.78 R2-USB.2 | v145.22,52.98 145.22,50.62 R2-USB1.1 | v145.22,54.08 145.22,54.78 R2-USB.2 | J2.B12 164.4,51.18 164.4,50.97 J2.A1 164.47,50.9 164.47,49.72 164.95,49.24 J2.MP3 165.02,49.24 166.96,49.24 | 166.96,49.24 168.9,49.24 J2.MP1 | 166.96,59.42 165.02,59.42 J2.MP4 164.95,59.35 164.47,58.86 164.47,57.69 J2.A12 164.4,57.62 164.4,57.41 J2.B1 164.33,57.41 163.91,57.41 161.28,54.78 145.29,54.78 R2-USB.2 | 166.96,59.42 168.9,59.42 J2.MP2 | 166.96,59.42 166.96,49.24 | U4.9 147.78,14.4 147.09,15.1 147.09,15.37 U4.4 147.09,15.44 147.09,18.07 v147.23,18.21 | U4.6 147.57,13.5 147.57,14.13 147.78,14.34 U4.9 | U4.1 148.54,15.37 148.54,15.1 147.85,14.4 U4.9 | 147.29,23.68 147.29,24.65 MCP73831.2 | 147.29,23.68 147.29,22.37 C2_BAT.2 | 147.88,26.49 147.92,26.45 148.68,26.45 149.65,27.42 149.65,30.68 150.13,31.16 C1_BAT.2 | 147.88,26.49 147.78,26.59 147.78,29.22 146.39,30.61 146.39,30.75 R2_BAT.1 | 147.88,26.49 v147.78,26.38 | v147.36,23.68 147.29,23.68
  Top 0.15: C2.2 141.75,9.28 142.59,9.28 143.14,9.83 145.7,9.83 145.98,9.56 SENSOR2.1 | SENSOR2.7 146.81,6.65 146.81,7.62 146.05,8.38 146.05,9.49 SENSOR2.1 | J3.1 165.23,17.8 162.6,17.8 150.48,5.68 C1.2 150.41,5.68 149.37,5.68 148.47,6.58 SENSOR2.5 148.47,6.65 149.1,7.28 149.1,11.1 147.36,11.1 | SENSOR2.1 145.91,9.7 146.46,10.25 147.36,10.25 147.36,11.1 | 58.48,91.44 59.76,92.73 C1_BAT2.2 59.76,92.8 58.93,93.63 58.93,96.67 TANT.- | 58.48,91.44 55.4,88.36 55.4,88.02 C1_BAT1.2 | 58.48,91.44 59.76,90.16 59.76,89.4 59.62,89.26 59.55,89.26 59.14,88.85 IC4.2 59.28,88.92 v59.9,88.29 | v59.9,86.7 61.22,85.39 R1_PWRUSB.1 61.29,85.32 68.77,85.32 73.54,80.54 80.61,80.54 81.51,79.64 81.51,79.36 U3.13 81.58,79.29 81.58,78.94 86.56,73.96 86.56,72.37 C8.2 86.56,72.3 86.56,70.36 85.66,69.46 C10_SUPERCUP.1 85.87,69.6 88.64,66.83 | C10.2 67.52,107.2 66.06,107.2 65.72,107.55 CHANGE_BUTTON.2 65.65,107.61 63.29,107.61 | 63.29,107.61 62.26,107.61 CHANGE_BUTTON.1 62.19,107.61 61.49,108.31 61.42,108.31 60.94,108.79 54.08,108.79 52.98,107.68 50.69,107.68 BOOT_BUTTON.2 50.69,107.61 47.3,107.61 BOOT_BUTTON.1 47.23,107.55 46.81,107.13 45.29,107.13 C6.2 45.22,107.13 45.01,107.34 27.49,107.34 C5.2 27.42,107.41 25.9,107.41 25.76,107.55 RESET_BUTTON.2 25.69,107.61 22.23,107.61 RESET_BUTTON.1 22.16,107.61 21.26,107.61 20.98,107.89 19.94,107.89 6.58,94.53 6.58,92.93 6.23,92.59 4.92,92.59 J4.P6 | 22.71,100.48 21.74,101.45 20.77,101.45 C_DELAY.2 | 22.71,100.48 24.52,100.48 25,100.97 25,101.11 IC1.3 | 22.71,100.48 22.71,94.87 18.84,91 C9.2 18.84,90.92 15.51,90.92 J4.G2 15.51,90.86 14.61,89.96 14.61,87.19 15.44,86.36 15.44,85.32 J4.G1 15.37,85.32 14.13,85.32 11.08,82.27 1.32,82.27 J4.G3 1.25,82.27 1.25,89.06 4.71,92.52 J4.P6
  Top 0.15: J4.P6 4.85,92.59 4.71,92.59 2.29,95.01 2.29,95.36 J4.G4 2.29,95.43 2.49,95.63 2.49,105.61 TP4.TP | v63.29,107.55 63.29,107.61 | 140.89,53.5 127.56,66.83 88.64,66.83 | v88.64,66.76 88.64,66.83 | 147.36,11.1 147.36,12.37 147.42,12.43 v147.42,12.53
  Bottom 0.15: v11.56,48.54 v11.56,44.94 11.56,38.36 v7.83,34.62 | v19.53,16.62 v22.92,16.62 | 84.28,42.45 84.28,38.09 v87.19,35.18 | 84.28,42.45 84.28,44.46 | 84.28,44.46 v84.28,45.64 | v84.21,44.46 84.28,44.46 | v145.22,54.08 v145.22,52.98 145.22,29.02 147.78,26.45 v147.78,26.38 147.36,25.97 v147.36,23.68 147.36,23.61 147.23,23.48 v147.23,18.21 147.23,12.72 v147.42,12.53 | v59.9,86.7 v59.9,88.29 59.9,88.99 63.29,92.38 v63.29,107.55 | 84.28,42.45 83.65,42.45 80.61,45.5 80.61,58.72 v88.64,66.76
GPIO8
  Top 0.15: R1.2 19.39,23.61 19.39,35.52 19.18,35.73 U2.10
I2C_PW  (via drill 0.3)
  Top 0.15: 147.64,5.89 147.64,6.58 SENSOR2.6 147.57,6.65 147.57,7.27 146.88,7.96 146.88,9.49 SENSOR2.2 | 147.64,5.89 147.64,4.02 R1-PINH.2 147.71,4.36 150.41,4.36 C1.1 | 147.64,5.89 146.53,5.89 146.05,6.37 146.05,6.58 SENSOR2.8 145.98,6.65 145.01,6.65 143.76,7.89 R2-PINH.2 143.69,7.96 141.75,7.96 C2.1 141.69,7.96 141.48,8.17 v140.92,8.17 | v80.88,41.06 80.68,40.86 33.79,40.86 21.68,52.98 21.68,53.18 U2.17
  Bottom 0.15: v80.88,41.06 86.7,35.25 86.7,35.04 113.57,8.17 v140.92,8.17
INT_RTC  (via drill 0.3)
  Top 0.15: 82.82,96.95 82.82,109.35 82.75,109.42 TP15.TP | 82.82,96.95 82.82,96.26 R1-PINH1.1 | v17.45,34.62 16.62,35.46 16.62,35.73 U2.8 | v81.72,87.19 82.75,88.22 82.75,88.57 U3.3 82.82,88.22 83.72,87.32 84.42,87.32 84.76,87.67 84.76,96.74 84.55,96.95 82.82,96.95
  Bottom 0.15: v17.45,34.62 18.14,34.62 35.52,52.01 46.54,52.01 v81.72,87.19
IO/BOOT  (via drill 0.3)
  Top 0.15: R_BOOT.2 52.56,108.44 51.38,108.44 50.76,109.07 BOOT_BUTTON.3 50.69,109.07 47.3,109.07 BOOT_BUTTON.4 47.23,109.07 46.54,108.38 45.29,108.38 C6.1 45.22,108.31 44.74,107.82 v44.46,107.82 | v24.24,54.36 24.24,53.25 U2.15
  Bottom 0.15: v24.24,54.36 24.24,87.6 v44.46,107.82
IO/CHANGE  (via drill 0.3)
  Top 0.15: CHANGE_BUTTON.4 62.26,109.07 65.65,109.07 CHANGE_BUTTON.3 65.72,109.07 66.89,109.07 67.52,108.44 C10.1 67.59,108.38 68.28,107.68 68.28,106.71 68.14,106.58 61.7,106.58 | 61.7,106.58 61.29,106.99 61.29,107.13 60.39,108.03 60.39,108.17 R_CHANGE.2 | v23.61,54.36 14.89,54.36 14.06,53.53 U2.23 | v61.7,106.51 61.7,106.58
  Bottom 0.15: v23.61,54.36 24.1,53.88 24.38,53.88 61.7,91.2 v61.7,106.51
MISO  (via drill 0.3)
  Top 0.15: TP6.TP 2.63,108.52 3.74,107.41 3.74,94.67 4.71,93.69 5.05,93.69 J4.P7 5.12,93.63 5.54,93.63 v6.09,93.07 | v14.27,16.69 14.27,14.27 R8.1 | v13.64,18.35 14.34,19.04 D12.1 | U1.2 46.47,45.15 34.49,45.15 24.31,55.33 10.8,55.33 9,53.53 9,53.25 U2.27 9,53.18 9,52.98 v12.05,49.93
  Bottom 0.15: v14.27,16.69 14.27,17.73 v13.64,18.35 13.64,20.22 12.05,21.81 v12.05,49.93 12.05,50 8.52,53.53 8.52,57.55 3.39,62.67 3.39,82.89 6.09,85.59 v6.09,93.07
MOSI  (via drill 0.3)
  Top 0.15: v81.72,14.54 82.34,15.17 82.34,15.51 J1.14 | v58.86,3.53 57.89,2.56 TP7.TP | v18.84,16.69 18.84,14.27 R7.1 | v18.14,18.35 18.84,19.04 D11.1 | v53.05,41.34 54.22,42.52 U1.5 | v18.91,31.86 15.37,35.39 15.37,35.73 U2.7 | v11.63,83.45 5.89,89.19 5.12,89.19 J4.P3
  Bottom 0.15: v81.72,14.54 69.87,14.54 v58.86,3.53 31.92,3.53 18.84,16.62 v18.84,16.69 18.84,17.66 v18.14,18.35 18.14,22.44 23.23,27.53 | v53.05,41.34 37.05,41.34 23.23,27.53 | 23.23,27.53 v18.91,31.86 18.91,31.92 16.97,33.86 16.97,34.76 25.69,43.49 25.69,44.53 18.91,51.31 18.91,58.38 11.63,65.65 v11.63,83.45
N$1
  Top 0.15: R2_BAT.2 146.39,29.5 146.39,27.35 MCP73831.5
N$2
  Top 0.15: R2-USB1.2 146.6,50.62 149.23,50.62 151.59,52.98 164.4,52.98 J2.A5
N$3  (via drill 0.3)
  Top 0.15: v150.06,15.44 150.06,25.14 R1_BAT.1 | v146.74,23.68 146.74,24.38 146.46,24.65 MCP73831.1
  Bottom 0.15: v146.74,23.68 146.74,12.7 146.74,12.6 147.24,12.1 147.6,12.1 147.85,12.35 147.85,13.24 148.09,13.48 148.1,13.48 v150.06,15.44
N$4  (via drill 0.3)
  Top 0.15: 79.78,46.88 79.78,46.12 D3.2 | 79.78,46.88 79.78,49.58 C4.1 | v79.84,43.97 79.84,41.97 D4.1 | v79.84,46.88 79.78,46.88
  Bottom 0.15: v79.84,46.88 v79.84,43.97
N$5  (via drill 0.3)
  Top 0.15: v58.24,85.39 58.72,85.87 59.07,85.87 D2.1 | v57.48,86.15 56.72,86.15 Q1.2 56.65,85.87 56.65,87.95 C1_BAT1.1 56.72,87.88 58.38,87.88 | 58.38,87.88 59.07,87.88 IC4.3 | 58.38,87.88 58.38,89.19 58.93,89.75 59.07,89.75 IC4.1
  Bottom 0.15: v57.48,86.15 v58.24,85.39
N$6
  Top 0.15: CHG_LED.C 150.27,29.22 150.27,26.66 150.13,26.52 R1_BAT.2
N$7
  Top 0.15: J1.24 77.35,15.58 77.35,18.77 70.64,25.48 EPD_C12.1
N$8  (via drill 0.3)
  Top 0.15: v161.98,56.09 145.22,56.09 R2-USB.1 | v163.43,56.09 164.4,56.09 J2.B5
  Bottom 0.15: v163.43,56.09 v161.98,56.09
N$10
  Top 0.15: J1.22 78.39,23.34 76.24,25.48 76.11,25.48 EPD_C10.1
N$12  (via drill 0.3)
  Top 0.15: v21.54,103.6 20.77,102.84 C_DELAY.1 | v22.44,104.22 22.92,104.22 23.13,104.01 IC1.5
  Bottom 0.15: v21.54,103.6 21.81,103.6 v22.44,104.22
N$13
  Top 0.15: D7.1 86.28,93.83 86.28,77.7 88.16,75.83 R_CAPACITOR.2
N$15
  Top 0.15: J1.20 79.43,15.58 79.43,22.09 81.51,24.17 EPD_C8.1
N$17
  Top 0.15: J1.19 79.92,15.58 79.92,19.88 84.21,24.17 EPD_C7.1
N$19
  Top 0.15: J1.18 80.47,15.58 80.47,17.66 86.98,24.17 EPD_C2.1
N$23
  Top 0.15: J1.4 87.46,15.58 87.46,16.48 95.15,24.17 EPD_C1.1
N$24
  Top 0.15: J1.5 86.91,18.63 92.45,24.17 EPD_C3.1
PREVGH  (via drill 0.3)
  Top 0.15: J1.21 78.88,15.58 78.88,24.17 EPD_C9.1 78.88,24.24 v79.5,24.86 | v83.93,37.4 83.93,38.43 D5.1
  Bottom 0.15: v83.93,37.4 83.93,29.29 v79.5,24.86
PREVGL  (via drill 0.3)
  Top 0.15: 75.31,22.26 73.41,24.17 EPD_C11.1 | 75.31,22.26 77.84,19.74 77.84,15.58 J1.23 | v79.78,37.4 79.78,38.43 D4.2 | 75.31,22.26 v77.08,24.03
  Bottom 0.15: v79.78,37.4 79.78,26.73 v77.08,24.03
RESE
  Top 0.15: J1.3 87.95,15.51 87.95,15.17 88.29,14.82 96.05,14.82 R3.1 96.05,14.89 96.05,17.31 Q3.2
RESE'
  Top 0.15: R3.2 96.12,13.43 99.17,13.43 SJ1.2 99.23,13.43 102.42,13.43 R2.2
RESET  (via drill 0.3)
  Top 0.15: C5.1 27.42,108.72 26.11,108.72 25.76,109.07 RESET_BUTTON.3 25.69,109.07 24.38,109.07 23.41,108.1 v23.34,108.1 22.37,109.07 22.23,109.07 RESET_BUTTON.4 22.16,109.07 21.74,108.65 20.5,108.65 R_RESET.2 | v23.13,102 23.13,101.17 IC1.1 | v9.56,34.62 10.18,35.25 10.18,35.73 U2.3
  Bottom 0.15: v23.34,108.1 23.13,107.89 v23.13,102 14.4,102 3.12,90.72 3.12,62.53 6.58,59.07 6.58,35.25 7.69,34.14 7.96,34.14 8.45,34.62 v9.56,34.62
RTC_RST  (via drill 0.3)
  Top 0.15: v26.32,52.28 23.68,52.28 22.99,52.98 22.99,53.18 U2.16 | v80.47,87.19 81.51,88.22 81.51,88.57 U3.4
  Bottom 0.15: v26.32,52.28 45.57,52.28 v80.47,87.19
RX  (via drill 0.3)
  Top 0.15: v12.74,54.36 12.74,53.25 U2.24 | v4.5,63.78 4.5,67.45 1.94,70.01 TP2.TP
  Bottom 0.15: v12.74,54.36 12.74,55.54 v4.5,63.78
SCK  (via drill 0.3)
  Top 0.15: v79.71,14.06 81.85,14.06 82.89,15.1 82.89,15.51 J1.13 | v63.23,3.53 62.26,2.56 TP8.TP 62.19,2.56 v59.28,2.56 | v74.03,43.77 54.29,43.77 U1.6 | v16.55,16.76 16.55,14.27 R6.1 | v15.86,18.35 16.62,19.11 D10.1 | v13.99,31.44 13.99,35.73 U2.6 | v3.88,82.75 3.88,90.79 4.5,91.41 5.05,91.41 J4.P5
  Bottom 0.15: v63.23,3.53 73.75,14.06 v79.71,14.06 81.85,14.06 84.14,16.34 84.14,17.45 79.01,22.58 79.01,25 80.26,26.25 80.26,37.53 v74.03,43.77 | v3.88,82.75 3.88,65.03 13.99,54.91 v13.99,31.44 12.33,29.78 12.33,21.95 15.86,18.42 v15.86,18.35 16.55,17.66 v16.55,16.76 16.62,16.76 30.82,2.56 v59.28,2.56
SCL  (via drill 0.3, 0.35)
  Top 0.15: v145.36,9.21 143.76,9.21 R2-PINH.1 143.69,9.21 143.14,8.66 140.78,8.66 140.44,8.31 140.44,8.03 145.43,3.05 152.21,3.05 166.41,17.24 166.41,19.94 165.58,20.77 165.3,20.77 J3.4 | v147.5,8.17 147.99,8.17 148.4,8.59 148.4,9.49 SENSOR2.4 148.22,9.74 148.22,10.28 148.1,10.4 v148.1,10.6 | v19.39,52.15 18.7,52.15 17.87,52.98 17.87,53.18 U2.20 | v74.17,81.51 83.45,81.51 85.32,79.64 85.32,79.36 U3.16 85.39,79.29 85.8,78.88 v85.8,77.91 | v148.2,11.9 148.22,11.92 148.22,13.32 U4.7
  Bottom 0.15: v147.5,8.17 146.46,9.21 v145.36,9.21 145.36,13.5 89.4,69.46 89.4,74.31 v85.8,77.91 | v19.39,52.15 25.14,52.15 54.5,81.51 v74.17,81.51 | v148.2,11.9 148.2,10.7 v148.1,10.6
SDA  (via drill 0.3)
  Top 0.15: v149.5,14.15 148.85,13.5 148.61,13.5 U4.8 | v147.85,8.66 147.85,9.28 147.64,9.49 SENSOR2.3 | v146.39,5.4 146.39,4.02 R1-PINH.1 146.46,4.02 147.16,3.32 152.07,3.32 166.13,17.38 166.13,19.18 165.58,19.74 165.3,19.74 J3.3 | v20.5,51.66 19.18,52.98 19.18,53.18 U2.19 | v73.68,81.02 82.68,81.02 84.07,79.64 84.07,79.36 U3.15 84.07,79.22 84.07,78.94 v85.11,77.91
  Bottom 0.15: v149.5,14.15 149.5,10.3 v147.85,8.66 147.85,8.59 147.99,8.45 147.99,8.03 146.91,6.96 | v146.39,5.4 146.39,6.44 146.91,6.96 | v20.5,51.66 25.07,51.66 54.43,81.02 v73.68,81.02 | 146.91,6.96 89.12,64.75 89.12,73.89 v85.11,77.91
SRC  (via drill 0.3)
  Top 0.15: v81.09,45.64 81.09,49.58 C4.2 | v83.79,42.94 83.79,42.17 83.93,42.03 D5.2 83.86,42.45 89.61,42.45 L1.1 | v98.2,25.97 98.2,18.07 Q3.3
  Bottom 0.15: v83.79,42.94 82.37,44.35 | 82.37,44.35 v81.09,45.64 | v98.2,25.97 84.76,39.4 84.76,45.77 84.42,46.12 84.14,46.12 82.37,44.35
SS_SD  (via drill 0.3)
  Top 0.15: v12.12,16.69 12.12,14.27 R10.1 | v12.88,18.28 12.12,19.04 D8.1 12.12,19.11 v14.47,21.47 | v11.56,30.89 11.56,35.73 U2.4 | v10.94,82.75 5.54,88.16 J4.P2
  Bottom 0.15: v12.12,16.69 12.12,17.52 v12.88,18.28 12.88,18.35 11.56,19.67 v11.56,30.89 | v10.94,82.75 10.94,58.38 14.47,54.85 v14.47,21.47
TX  (via drill 0.3)
  Top 0.15: v11.49,54.36 11.49,53.25 U2.25 | v3.88,63.78 3.88,65.09 1.94,67.03 TP1.TP
  Bottom 0.15: v11.49,54.36 11.49,56.16 v3.88,63.78
USB_D+  (via drill 0.3)
  Top 0.15: v87.6,66.41 100.55,53.46 139.61,53.46 D1.1 | v29.22,35.87 24.31,35.87 24.24,35.8 U2.14
  Bottom 0.15: v87.6,66.41 64.33,66.41 40.44,42.52 35.87,42.52 v29.22,35.87
USB_D-  (via drill 0.3)
  Top 0.15: v117.66,51.52 139.61,51.52 D1.3 | v98.89,46.67 v112.81,46.67 | v88.5,36.29 30.26,36.29 29.36,35.39 26.04,35.39 25.83,35.59 25.55,35.59 24.72,34.76 23.68,34.76 22.99,35.46 22.99,35.73 U2.13
  Bottom 0.15: v112.81,46.67 v117.66,51.52 | v88.5,36.29 v98.89,46.67
VBAT
  Top 0.3: U4.3 147.57,15.44 148.06,15.44 U4.2 148.13,15.58 148.13,18.77 | MCP73831.3 148.33,24.65 148.47,24.52 148.47,22.37 C2_BAT.1 148.4,22.23 148.13,21.95 148.13,18.77 | 105.47,18.77 105.47,2.08 TP3.TP | 105.47,18.77 105.47,32.96 100.55,37.88 99.86,37.88 97.99,39.75 33.1,39.75 27.91,44.94 14.4,44.94 6.92,52.42 6.92,54.08 16.41,63.57 16.41,88.36 18.28,90.23 31.09,90.23 36.42,84.9 54.5,84.9 Q1.3 | 105.47,18.77 148.13,18.77
VBUS
  Top 0.3: MCP73831.4 148.33,27.35 148.33,28.74 148.75,29.15 CHG_LED.A 148.82,29.29 148.82,31.16 C1_BAT.1 148.96,31.3 154.25,36.6 | 154.25,36.6 159.69,42.03 168.62,42.03 TP14.TP | Q1.1 56.65,83.93 59,83.93 D2.2 59.14,83.86 61.08,83.86 61.22,84 R1_PWRUSB.2 61.35,83.93 69.32,83.93 106.02,47.23 137.6,47.23 C5_USB.1 137.74,47.16 139.75,47.16 C4_USB.1 139.88,47.23 141.69,47.23 141.96,47.51 PFMF.050.1.2 142.17,47.51 142.76,48.09 | 142.76,48.09 143.07,48.41 143.07,51.94 142.52,52.49 142.17,52.49 D1.5 | 142.76,48.09 154.25,36.6
VRTC
  Top 0.3: C10_SUPERCUP.2 87.88,69.46 87.88,72.23 C8.1 87.95,72.37 87.95,74.24 88.16,74.44 R_CAPACITOR.1 87.81,74.31 87.39,74.31 82.82,78.88 82.82,79.29 U3.14
VUSB
  Top 0.3: J2.A9 164.4,56.78 164.4,56.58 J2.B4 164.54,56.51 165.09,56.51 165.3,56.3 165.3,52.28 165.09,52.08 164.54,52.08 J2.B9 164.4,52.01 164.4,51.8 J2.A4 164.26,51.73 150.9,51.73 146.67,47.51 PFMF.050.1.1